# EAGLE board BlueSMiRF-ChipAnt-GiantPanel (EAGLE 6.4), part 1 of 5
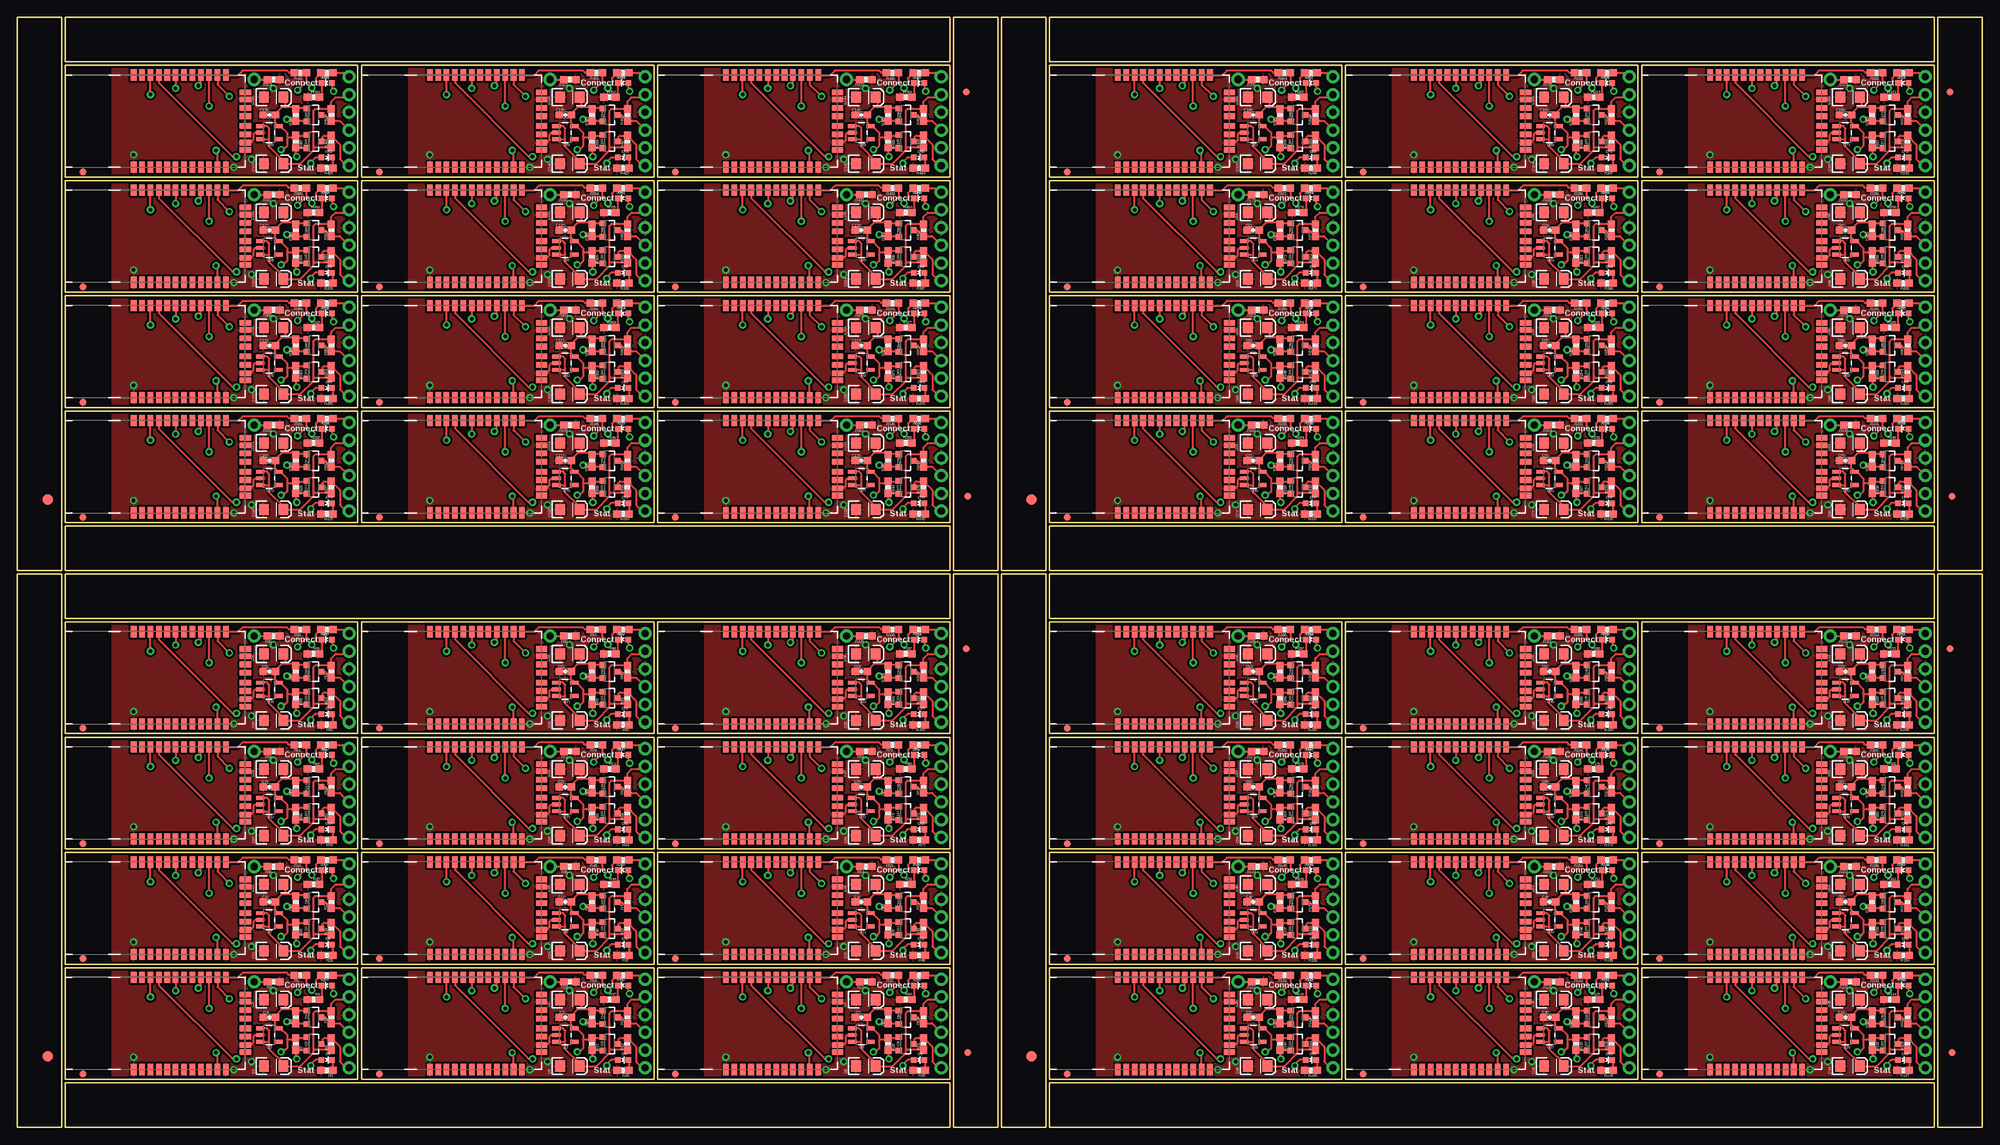
[diagram p0: board, top side]
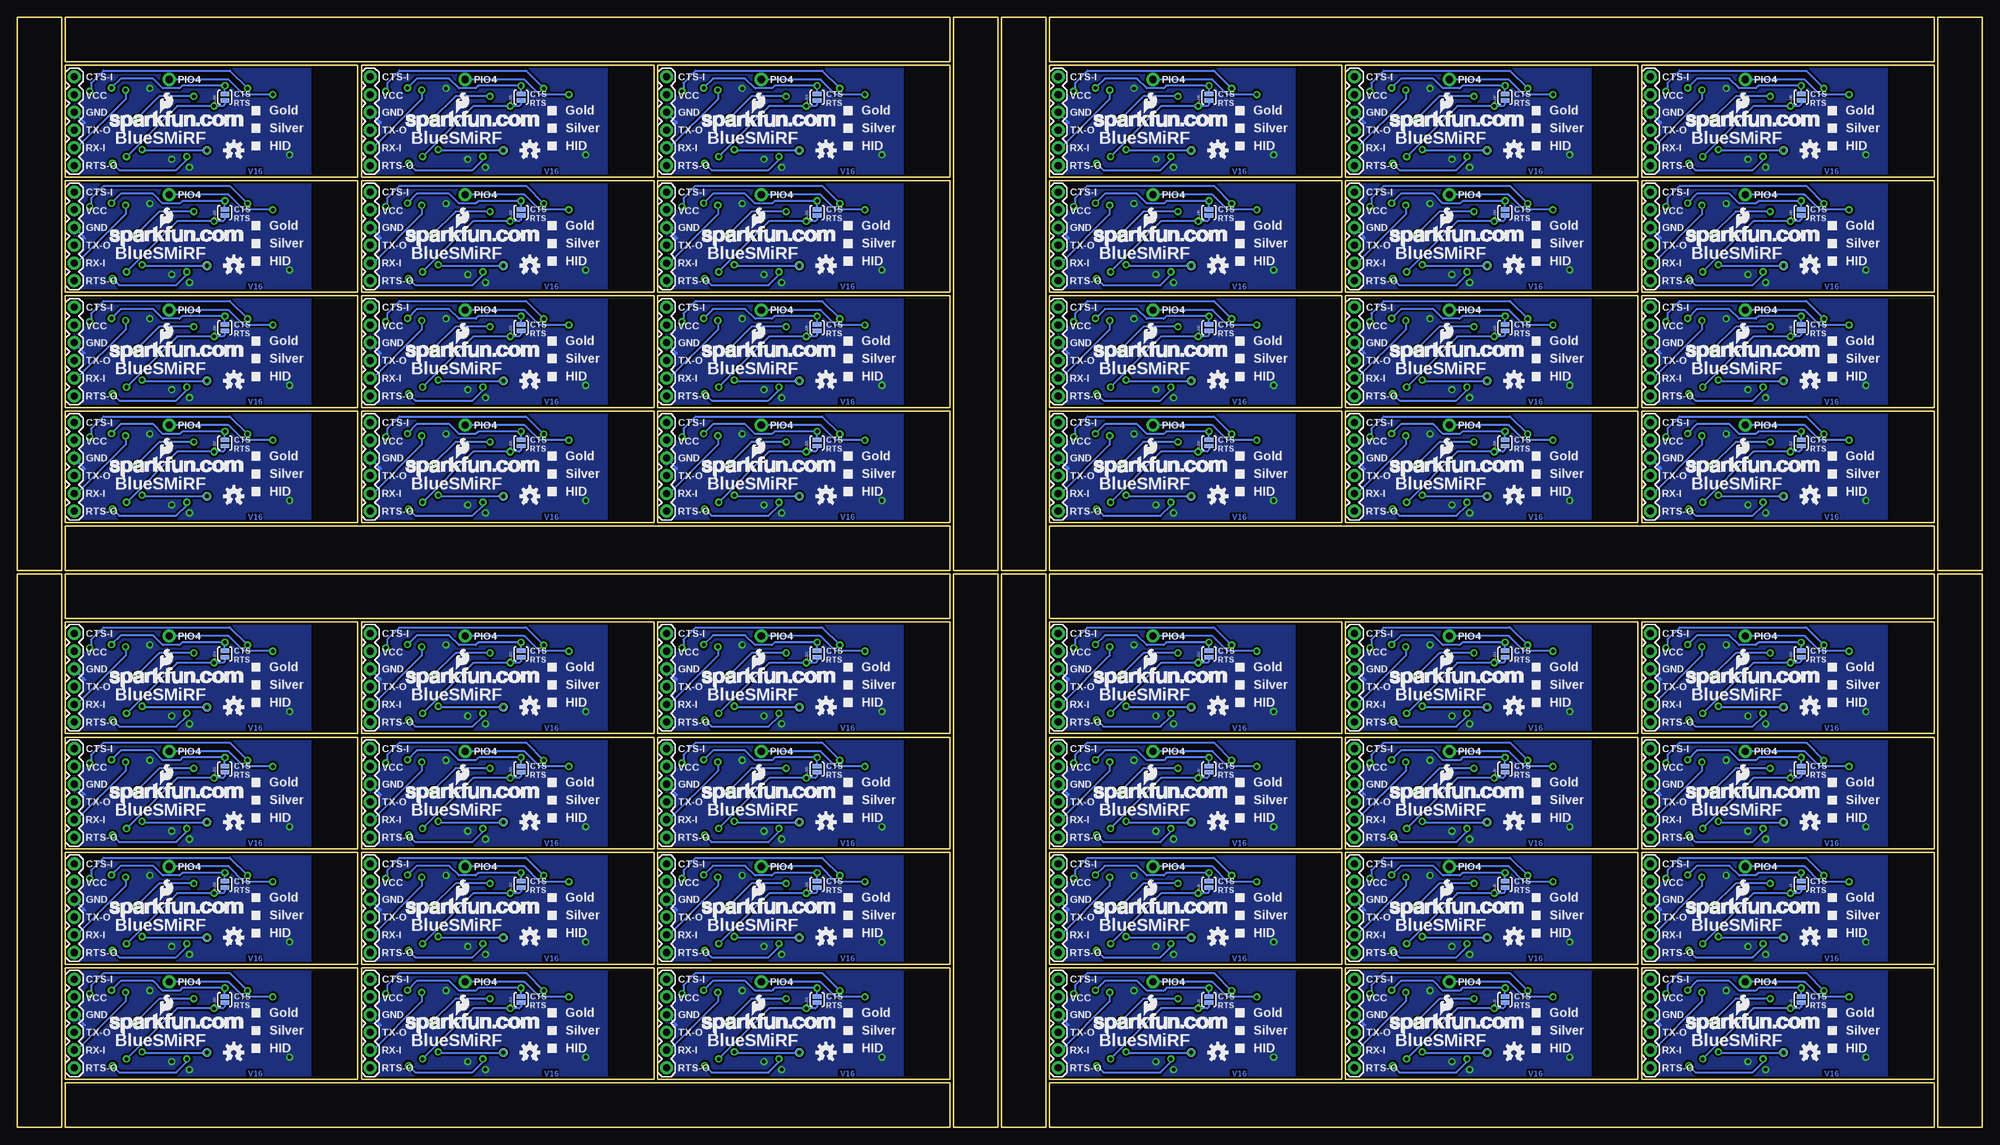
[diagram p1: board, bottom side, seen from below]

Size 281.43 x 159 mm. Coordinates in mm from the lower left corner, seen from the top.
Outline: 256 segments
Copper layers (1*16): Top 0.035mm / dielectric 1.5mm / Bottom 0.035mm
Design rules "SparkFun *": minimum track width 8mil, minimum drill 20mil, track to track 8mil, track to pad 8mil, pad to pad 8mil, via to via 8mil, smd to smd 8mil, copper to edge 10mil, drill to drill 8mil, minimum pad ring 12mil, minimum via ring 10mil, stop-mask expansion 4mil, vias tented up to drill 20mil, thermal gap 10mil

## Footprints (pad centres in the part's own frame; a part is rotated, then mirrored left to right if it is on the bottom)
EIA3216 = smd 1.4 x 1.6: A 1.4,0; C -1.4,0
0603-CAP = smd 1.1 x 1: 1 -0.85,0; 2 0.85,0
LED-0603 = smd 0.8 x 0.8: A 0,-0.75; C 0,0.75
FIDUCIAL-1.5X3 = smd 1.5 x 1.5: 1 0,0
FIDUCIAL-1X2 = smd 1 x 1: 1 0,0
1X06 = drill 1.016 pad 1.88: 1 0,0; 2 2.54,0; 3 5.08,0; 4 7.62,0; 5 10.16,0; 6 12.7,0
1X01NS = drill 1.016 pad 1.88: 1 0,0
SOT23-3 = smd 0.8 x 0.9: 1 -0.95,-1; 2 0.95,-1; 3 0,1.1
0603-RES = smd 1.1 x 1: 1 -0.85,0; 2 0.85,0
SJ_2S-NO = smd 0.635 x 1.27: 1 -0.45,0; 2 0.45,0
PAD.03X.05 = smd 1.27 x 1.27: P$1 0,0
RN41 = smd 0.8 x 1.6: 1 -6.6,-6.6; 2 -5.4,-6.6; 3 -4.2,-6.6; 4 -3,-6.6; 5 -1.8,-6.6; 6 -0.6,-6.6; 7 0.6,-6.6; 8 1.8,-6.6; 9 3,-6.6; 10 4.2,-6.6; 11 5.4,-6.6; 12 6.6,-6.6; 13 6.6,6.6; 14 5.4,6.6; 15 4.2,6.6; 16 3,6.6; 17 1.8,6.6; 18 0.6,6.6; 19 -0.6,6.6; 20 -1.8,6.6; 21 -3,6.6; 22 -4.2,6.6; 23 -5.4,6.6; 24 -6.6,6.6 | smd 1.6 x 0.8: 28 9.4,3.1; 29 9.4,-3.1; 30 9.4,4.122; 31 9.4,1.9; 32 9.4,0.7; 33 9.4,-0.7; 34 9.4,-1.9; 35 9.4,-4.122
SOT23-5 = smd 0.55 x 1.2: 1 -0.95,-1.3; 2 0,-1.3; 3 0.95,-1.3; 4 0.95,1.3; 5 -0.95,1.3

## Placement (x,y rotation side)
C1  10uF  [EIA3216]  36.7,8.76 0 top
C2  1uF  [0603-CAP]  78.49,15.75 180 top
C3  10uF  [EIA3216]  36.7,18.29 0 top
C4  1uF  [0603-CAP]  36.07,15.75 180 top
C5  10uF  [EIA3216]  79.12,8.76 0 top
C6  10uF  [EIA3216]  79.12,18.29 0 top
C7  1uF  [0603-CAP]  120.9,15.75 180 top
C8  10uF  [EIA3216]  121.54,8.76 0 top
C9  10uF  [EIA3216]  121.54,18.29 0 top
C10  1uF  [0603-CAP]  36.07,32.26 180 top
C11  10uF  [EIA3216]  36.7,25.27 0 top
C12  10uF  [EIA3216]  36.7,34.8 0 top
C13  1uF  [0603-CAP]  78.49,32.26 180 top
C14  10uF  [EIA3216]  79.12,25.27 0 top
C15  10uF  [EIA3216]  79.12,34.8 0 top
C16  1uF  [0603-CAP]  120.9,32.26 180 top
C17  10uF  [EIA3216]  121.54,25.27 0 top
C18  10uF  [EIA3216]  121.54,34.8 0 top
C19  1uF  [0603-CAP]  36.07,48.77 180 top
C20  10uF  [EIA3216]  36.7,41.78 0 top
C21  10uF  [EIA3216]  36.7,51.31 0 top
C22  1uF  [0603-CAP]  78.49,48.77 180 top
C23  10uF  [EIA3216]  79.12,41.78 0 top
C24  10uF  [EIA3216]  79.12,51.31 0 top
C25  1uF  [0603-CAP]  120.9,48.77 180 top
C26  10uF  [EIA3216]  121.54,41.78 0 top
C27  10uF  [EIA3216]  121.54,51.31 0 top
C28  1uF  [0603-CAP]  36.07,65.28 180 top
C29  10uF  [EIA3216]  36.7,58.29 0 top
C30  10uF  [EIA3216]  36.7,67.82 0 top
C31  1uF  [0603-CAP]  78.49,65.28 180 top
C32  10uF  [EIA3216]  79.12,58.29 0 top
C33  10uF  [EIA3216]  79.12,67.82 0 top
C34  1uF  [0603-CAP]  120.9,65.28 180 top
C35  10uF  [EIA3216]  121.54,58.29 0 top
C36  10uF  [EIA3216]  121.54,67.82 0 top
C37  1uF  [0603-CAP]  177.04,15.75 180 top
C38  10uF  [EIA3216]  177.67,8.76 0 top
C39  10uF  [EIA3216]  177.67,18.29 0 top
C40  1uF  [0603-CAP]  219.46,15.75 180 top
C41  10uF  [EIA3216]  220.09,8.76 0 top
C42  10uF  [EIA3216]  220.09,18.29 0 top
C43  1uF  [0603-CAP]  261.87,15.75 180 top
C44  10uF  [EIA3216]  262.51,8.76 0 top
C45  10uF  [EIA3216]  262.51,18.29 0 top
C46  1uF  [0603-CAP]  177.04,32.26 180 top
C47  10uF  [EIA3216]  177.67,25.27 0 top
C48  10uF  [EIA3216]  177.67,34.8 0 top
C49  1uF  [0603-CAP]  219.46,32.26 180 top
C50  10uF  [EIA3216]  220.09,25.27 0 top
C51  10uF  [EIA3216]  220.09,34.8 0 top
C52  1uF  [0603-CAP]  261.87,32.26 180 top
C53  10uF  [EIA3216]  262.51,25.27 0 top
C54  10uF  [EIA3216]  262.51,34.8 0 top
C55  1uF  [0603-CAP]  177.04,48.77 180 top
C56  10uF  [EIA3216]  177.67,41.78 0 top
C57  10uF  [EIA3216]  177.67,51.31 0 top
C58  1uF  [0603-CAP]  219.46,48.77 180 top
C59  10uF  [EIA3216]  220.09,41.78 0 top
C60  10uF  [EIA3216]  220.09,51.31 0 top
C61  1uF  [0603-CAP]  261.87,48.77 180 top
C62  10uF  [EIA3216]  262.51,41.78 0 top
C63  10uF  [EIA3216]  262.51,51.31 0 top
C64  1uF  [0603-CAP]  177.04,65.28 180 top
C65  10uF  [EIA3216]  177.67,58.29 0 top
C66  10uF  [EIA3216]  177.67,67.82 0 top
C67  1uF  [0603-CAP]  219.46,65.28 180 top
C68  10uF  [EIA3216]  220.09,58.29 0 top
C69  10uF  [EIA3216]  220.09,67.82 0 top
C70  1uF  [0603-CAP]  261.87,65.28 180 top
C71  10uF  [EIA3216]  262.51,58.29 0 top
C72  10uF  [EIA3216]  262.51,67.82 0 top
C73  1uF  [0603-CAP]  177.04,95.5 180 top
C74  10uF  [EIA3216]  177.67,88.52 0 top
C75  10uF  [EIA3216]  177.67,98.04 0 top
C76  1uF  [0603-CAP]  219.46,95.5 180 top
C77  10uF  [EIA3216]  220.09,88.52 0 top
C78  10uF  [EIA3216]  220.09,98.04 0 top
C79  1uF  [0603-CAP]  261.87,95.5 180 top
C80  10uF  [EIA3216]  262.51,88.52 0 top
C81  10uF  [EIA3216]  262.51,98.04 0 top
C82  1uF  [0603-CAP]  177.04,112.01 180 top
C83  10uF  [EIA3216]  177.67,105.03 0 top
C84  10uF  [EIA3216]  177.67,114.55 0 top
C85  1uF  [0603-CAP]  219.46,112.01 180 top
C86  10uF  [EIA3216]  220.09,105.03 0 top
C87  10uF  [EIA3216]  220.09,114.55 0 top
C88  1uF  [0603-CAP]  261.87,112.01 180 top
C89  10uF  [EIA3216]  262.51,105.03 0 top
C90  10uF  [EIA3216]  262.51,114.55 0 top
C91  1uF  [0603-CAP]  177.04,128.52 180 top
C92  10uF  [EIA3216]  177.67,121.54 0 top
C93  10uF  [EIA3216]  177.67,131.06 0 top
C94  1uF  [0603-CAP]  219.46,128.52 180 top
C95  10uF  [EIA3216]  220.09,121.54 0 top
C96  10uF  [EIA3216]  220.09,131.06 0 top
C97  1uF  [0603-CAP]  261.87,128.52 180 top
C98  10uF  [EIA3216]  262.51,121.54 0 top
C99  10uF  [EIA3216]  262.51,131.06 0 top
C100  1uF  [0603-CAP]  177.04,145.03 180 top
C101  10uF  [EIA3216]  177.67,138.05 0 top
C102  10uF  [EIA3216]  177.67,147.57 0 top
C103  1uF  [0603-CAP]  219.46,145.03 180 top
C104  10uF  [EIA3216]  220.09,138.05 0 top
C105  10uF  [EIA3216]  220.09,147.57 0 top
C106  1uF  [0603-CAP]  261.87,145.03 180 top
C107  10uF  [EIA3216]  262.51,138.05 0 top
C108  10uF  [EIA3216]  262.51,147.57 0 top
C109  1uF  [0603-CAP]  36.07,95.5 180 top
C110  10uF  [EIA3216]  36.7,88.52 0 top
C111  10uF  [EIA3216]  36.7,98.04 0 top
C112  1uF  [0603-CAP]  78.49,95.5 180 top
C113  10uF  [EIA3216]  79.12,88.52 0 top
C114  10uF  [EIA3216]  79.12,98.04 0 top
C115  1uF  [0603-CAP]  120.9,95.5 180 top
C116  10uF  [EIA3216]  121.54,88.52 0 top
C117  10uF  [EIA3216]  121.54,98.04 0 top
C118  1uF  [0603-CAP]  36.07,112.01 180 top
C119  10uF  [EIA3216]  36.7,105.03 0 top
C120  10uF  [EIA3216]  36.7,114.55 0 top
C121  1uF  [0603-CAP]  78.49,112.01 180 top
C122  10uF  [EIA3216]  79.12,105.03 0 top
C123  10uF  [EIA3216]  79.12,114.55 0 top
C124  1uF  [0603-CAP]  120.9,112.01 180 top
C125  10uF  [EIA3216]  121.54,105.03 0 top
C126  10uF  [EIA3216]  121.54,114.55 0 top
C127  1uF  [0603-CAP]  36.07,128.52 180 top
C128  10uF  [EIA3216]  36.7,121.54 0 top
C129  10uF  [EIA3216]  36.7,131.06 0 top
C130  1uF  [0603-CAP]  78.49,128.52 180 top
C131  10uF  [EIA3216]  79.12,121.54 0 top
C132  10uF  [EIA3216]  79.12,131.06 0 top
C133  1uF  [0603-CAP]  120.9,128.52 180 top
C134  10uF  [EIA3216]  121.54,121.54 0 top
C135  10uF  [EIA3216]  121.54,131.06 0 top
C136  1uF  [0603-CAP]  36.07,145.03 180 top
C137  10uF  [EIA3216]  36.7,138.05 0 top
C138  10uF  [EIA3216]  36.7,147.57 0 top
C139  1uF  [0603-CAP]  78.49,145.03 180 top
C140  10uF  [EIA3216]  79.12,138.05 0 top
C141  10uF  [EIA3216]  79.12,147.57 0 top
C142  1uF  [0603-CAP]  120.9,145.03 180 top
C143  10uF  [EIA3216]  121.54,138.05 0 top
C144  10uF  [EIA3216]  121.54,147.57 0 top
D1  Red  [LED-0603]  44.32,9.65 270 top
D2  Green  [LED-0603]  44.32,20.32 90 top
D3  Green  [LED-0603]  86.74,20.32 90 top
D4  Red  [LED-0603]  86.74,9.65 270 top
D5  Green  [LED-0603]  129.16,20.32 90 top
D6  Red  [LED-0603]  129.16,9.65 270 top
D7  Green  [LED-0603]  44.32,36.83 90 top
D8  Red  [LED-0603]  44.32,26.16 270 top
D9  Green  [LED-0603]  86.74,36.83 90 top
D10  Red  [LED-0603]  86.74,26.16 270 top
D11  Green  [LED-0603]  129.16,36.83 90 top
D12  Red  [LED-0603]  129.16,26.16 270 top
D13  Green  [LED-0603]  44.32,53.34 90 top
D14  Red  [LED-0603]  44.32,42.67 270 top
D15  Green  [LED-0603]  86.74,53.34 90 top
D16  Red  [LED-0603]  86.74,42.67 270 top
D17  Green  [LED-0603]  129.16,53.34 90 top
D18  Red  [LED-0603]  129.16,42.67 270 top
D19  Green  [LED-0603]  44.32,69.85 90 top
D20  Red  [LED-0603]  44.32,59.18 270 top
D21  Green  [LED-0603]  86.74,69.85 90 top
D22  Red  [LED-0603]  86.74,59.18 270 top
D23  Green  [LED-0603]  129.16,69.85 90 top
D24  Red  [LED-0603]  129.16,59.18 270 top
D25  Green  [LED-0603]  185.29,20.32 90 top
D26  Red  [LED-0603]  185.29,9.65 270 top
D27  Green  [LED-0603]  227.71,20.32 90 top
D28  Red  [LED-0603]  227.71,9.65 270 top
D29  Green  [LED-0603]  270.13,20.32 90 top
D30  Red  [LED-0603]  270.13,9.65 270 top
D31  Green  [LED-0603]  185.29,36.83 90 top
D32  Red  [LED-0603]  185.29,26.16 270 top
D33  Green  [LED-0603]  227.71,36.83 90 top
D34  Red  [LED-0603]  227.71,26.16 270 top
D35  Green  [LED-0603]  270.13,36.83 90 top
D36  Red  [LED-0603]  270.13,26.16 270 top
D37  Green  [LED-0603]  185.29,53.34 90 top
D38  Red  [LED-0603]  185.29,42.67 270 top
D39  Green  [LED-0603]  227.71,53.34 90 top
D40  Red  [LED-0603]  227.71,42.67 270 top
D41  Green  [LED-0603]  270.13,53.34 90 top
D42  Red  [LED-0603]  270.13,42.67 270 top
D43  Green  [LED-0603]  185.29,69.85 90 top
D44  Red  [LED-0603]  185.29,59.18 270 top
D45  Green  [LED-0603]  227.71,69.85 90 top
D46  Red  [LED-0603]  227.71,59.18 270 top
D47  Green  [LED-0603]  270.13,69.85 90 top
D48  Red  [LED-0603]  270.13,59.18 270 top
D49  Green  [LED-0603]  185.29,100.08 90 top
D50  Red  [LED-0603]  185.29,89.41 270 top
D51  Green  [LED-0603]  227.71,100.08 90 top
D52  Red  [LED-0603]  227.71,89.41 270 top
D53  Green  [LED-0603]  270.13,100.08 90 top
D54  Red  [LED-0603]  270.13,89.41 270 top
D55  Green  [LED-0603]  185.29,116.59 90 top
D56  Red  [LED-0603]  185.29,105.92 270 top
D57  Green  [LED-0603]  227.71,116.59 90 top
D58  Red  [LED-0603]  227.71,105.92 270 top
D59  Green  [LED-0603]  270.13,116.59 90 top
D60  Red  [LED-0603]  270.13,105.92 270 top
D61  Green  [LED-0603]  185.29,133.1 90 top
D62  Red  [LED-0603]  185.29,122.43 270 top
D63  Green  [LED-0603]  227.71,133.1 90 top
D64  Red  [LED-0603]  227.71,122.43 270 top
D65  Green  [LED-0603]  270.13,133.1 90 top
D66  Red  [LED-0603]  270.13,122.43 270 top
D67  Green  [LED-0603]  185.29,149.61 90 top
D68  Red  [LED-0603]  185.29,138.94 270 top
D69  Green  [LED-0603]  227.71,149.61 90 top
D70  Red  [LED-0603]  227.71,138.94 270 top
D71  Green  [LED-0603]  270.13,149.61 90 top
D72  Red  [LED-0603]  270.13,138.94 270 top
D73  Green  [LED-0603]  44.32,100.08 90 top
D74  Red  [LED-0603]  44.32,89.41 270 top
D75  Green  [LED-0603]  86.74,100.08 90 top
D76  Red  [LED-0603]  86.74,89.41 270 top
D77  Green  [LED-0603]  129.16,100.08 90 top
D78  Red  [LED-0603]  129.16,89.41 270 top
D79  Green  [LED-0603]  44.32,116.59 90 top
D80  Red  [LED-0603]  44.32,105.92 270 top
D81  Green  [LED-0603]  86.74,116.59 90 top
D82  Red  [LED-0603]  86.74,105.92 270 top
D83  Green  [LED-0603]  129.16,116.59 90 top
D84  Red  [LED-0603]  129.16,105.92 270 top
D85  Green  [LED-0603]  44.32,133.1 90 top
D86  Red  [LED-0603]  44.32,122.43 270 top
D87  Green  [LED-0603]  86.74,133.1 90 top
D88  Red  [LED-0603]  86.74,122.43 270 top
D89  Green  [LED-0603]  129.16,133.1 90 top
D90  Red  [LED-0603]  129.16,122.43 270 top
D91  Green  [LED-0603]  44.32,149.61 90 top
D92  Red  [LED-0603]  44.32,138.94 270 top
D93  Green  [LED-0603]  86.74,149.61 90 top
D94  Red  [LED-0603]  86.74,138.94 270 top
D95  Green  [LED-0603]  129.16,149.61 90 top
D96  Red  [LED-0603]  129.16,138.94 270 top
E$1  [FIDUCIAL-1.5X3]  4.32,10.16 0 top
E$2  [FIDUCIAL-1X2]  277.11,10.67 0 top
E$3  [FIDUCIAL-1X2]  276.86,68.58 180 top
E$4  [FIDUCIAL-1X2]  136.14,10.67 0 top
E$5  [FIDUCIAL-1.5X3]  145.29,10.16 0 top
E$6  [FIDUCIAL-1X2]  135.89,68.58 180 top
E$7  [FIDUCIAL-1X2]  277.11,90.42 0 top
E$8  [FIDUCIAL-1X2]  276.86,148.34 180 top
E$9  [FIDUCIAL-1.5X3]  145.29,89.92 0 top
E$10  [FIDUCIAL-1X2]  136.14,90.42 0 top
E$11  [FIDUCIAL-1X2]  135.89,148.34 180 top
E$12  [FIDUCIAL-1.5X3]  4.32,89.92 0 top
JP1  [1X06]  47.5,21.21 270 bottom
JP2  M01SMDNS  [1X01NS]  33.91,20.83 0 top
JP3  [1X06]  89.92,21.21 270 bottom
JP4  FIDUCIAL1X2  [FIDUCIAL-1X2]  9.4,7.62 0 top
JP5  M01SMDNS  [1X01NS]  76.33,20.83 0 top
JP6  FIDUCIAL1X2  [FIDUCIAL-1X2]  51.82,7.62 0 top
JP7  [1X06]  132.33,21.21 270 bottom
JP8  M01SMDNS  [1X01NS]  118.75,20.83 0 top
JP9  FIDUCIAL1X2  [FIDUCIAL-1X2]  94.23,7.62 0 top
JP10  [1X06]  47.5,37.72 270 bottom
JP11  M01SMDNS  [1X01NS]  33.91,37.34 0 top
JP12  FIDUCIAL1X2  [FIDUCIAL-1X2]  9.4,24.13 0 top
JP13  [1X06]  89.92,37.72 270 bottom
JP14  M01SMDNS  [1X01NS]  76.33,37.34 0 top
JP15  FIDUCIAL1X2  [FIDUCIAL-1X2]  51.82,24.13 0 top
JP16  [1X06]  132.33,37.72 270 bottom
JP17  M01SMDNS  [1X01NS]  118.75,37.34 0 top
JP18  FIDUCIAL1X2  [FIDUCIAL-1X2]  94.23,24.13 0 top
JP19  [1X06]  47.5,54.23 270 bottom
JP20  M01SMDNS  [1X01NS]  33.91,53.85 0 top
JP21  FIDUCIAL1X2  [FIDUCIAL-1X2]  9.4,40.64 0 top
JP22  [1X06]  89.92,54.23 270 bottom
JP23  M01SMDNS  [1X01NS]  76.33,53.85 0 top
JP24  FIDUCIAL1X2  [FIDUCIAL-1X2]  51.82,40.64 0 top
JP25  [1X06]  132.33,54.23 270 bottom
JP26  M01SMDNS  [1X01NS]  118.75,53.85 0 top
JP27  FIDUCIAL1X2  [FIDUCIAL-1X2]  94.23,40.64 0 top
JP28  [1X06]  47.5,70.74 270 bottom
JP29  M01SMDNS  [1X01NS]  33.91,70.36 0 top
JP30  FIDUCIAL1X2  [FIDUCIAL-1X2]  9.4,57.15 0 top
JP31  [1X06]  89.92,70.74 270 bottom
JP32  M01SMDNS  [1X01NS]  76.33,70.36 0 top
JP33  FIDUCIAL1X2  [FIDUCIAL-1X2]  51.82,57.15 0 top
JP34  [1X06]  132.33,70.74 270 bottom
JP35  M01SMDNS  [1X01NS]  118.75,70.36 0 top
JP36  FIDUCIAL1X2  [FIDUCIAL-1X2]  94.23,57.15 0 top
JP37  [1X06]  188.47,21.21 270 bottom
JP38  M01SMDNS  [1X01NS]  174.88,20.83 0 top
JP39  FIDUCIAL1X2  [FIDUCIAL-1X2]  150.37,7.62 0 top
JP40  [1X06]  230.89,21.21 270 bottom
JP41  M01SMDNS  [1X01NS]  217.3,20.83 0 top
JP42  FIDUCIAL1X2  [FIDUCIAL-1X2]  192.79,7.62 0 top
JP43  [1X06]  273.3,21.21 270 bottom
JP44  M01SMDNS  [1X01NS]  259.71,20.83 0 top
JP45  FIDUCIAL1X2  [FIDUCIAL-1X2]  235.2,7.62 0 top
JP46  [1X06]  188.47,37.72 270 bottom
JP47  M01SMDNS  [1X01NS]  174.88,37.34 0 top
JP48  FIDUCIAL1X2  [FIDUCIAL-1X2]  150.37,24.13 0 top
JP49  [1X06]  230.89,37.72 270 bottom
JP50  M01SMDNS  [1X01NS]  217.3,37.34 0 top
JP51  FIDUCIAL1X2  [FIDUCIAL-1X2]  192.79,24.13 0 top
JP52  [1X06]  273.3,37.72 270 bottom
JP53  M01SMDNS  [1X01NS]  259.71,37.34 0 top
JP54  FIDUCIAL1X2  [FIDUCIAL-1X2]  235.2,24.13 0 top
JP55  [1X06]  188.47,54.23 270 bottom
JP56  M01SMDNS  [1X01NS]  174.88,53.85 0 top
JP57  FIDUCIAL1X2  [FIDUCIAL-1X2]  150.37,40.64 0 top
JP58  [1X06]  230.89,54.23 270 bottom
JP59  M01SMDNS  [1X01NS]  217.3,53.85 0 top
JP60  FIDUCIAL1X2  [FIDUCIAL-1X2]  192.79,40.64 0 top
JP61  [1X06]  273.3,54.23 270 bottom
JP62  M01SMDNS  [1X01NS]  259.71,53.85 0 top
JP63  FIDUCIAL1X2  [FIDUCIAL-1X2]  235.2,40.64 0 top
JP64  [1X06]  188.47,70.74 270 bottom
JP65  M01SMDNS  [1X01NS]  174.88,70.36 0 top
JP66  FIDUCIAL1X2  [FIDUCIAL-1X2]  150.37,57.15 0 top
JP67  [1X06]  230.89,70.74 270 bottom
JP68  M01SMDNS  [1X01NS]  217.3,70.36 0 top
JP69  FIDUCIAL1X2  [FIDUCIAL-1X2]  192.79,57.15 0 top
JP70  [1X06]  273.3,70.74 270 bottom
JP71  M01SMDNS  [1X01NS]  259.71,70.36 0 top
JP72  FIDUCIAL1X2  [FIDUCIAL-1X2]  235.2,57.15 0 top
JP73  [1X06]  188.47,100.97 270 bottom
JP74  M01SMDNS  [1X01NS]  174.88,100.58 0 top
JP75  FIDUCIAL1X2  [FIDUCIAL-1X2]  150.37,87.38 0 top
JP76  [1X06]  230.89,100.97 270 bottom
JP77  M01SMDNS  [1X01NS]  217.3,100.58 0 top
JP78  FIDUCIAL1X2  [FIDUCIAL-1X2]  192.79,87.38 0 top
JP79  [1X06]  273.3,100.97 270 bottom
JP80  M01SMDNS  [1X01NS]  259.71,100.58 0 top
JP81  FIDUCIAL1X2  [FIDUCIAL-1X2]  235.2,87.38 0 top
JP82  [1X06]  188.47,117.47 270 bottom
JP83  M01SMDNS  [1X01NS]  174.88,117.09 0 top
JP84  FIDUCIAL1X2  [FIDUCIAL-1X2]  150.37,103.89 0 top
JP85  [1X06]  230.89,117.47 270 bottom
JP86  M01SMDNS  [1X01NS]  217.3,117.09 0 top
JP87  FIDUCIAL1X2  [FIDUCIAL-1X2]  192.79,103.89 0 top
JP88  [1X06]  273.3,117.47 270 bottom
JP89  M01SMDNS  [1X01NS]  259.71,117.09 0 top
JP90  FIDUCIAL1X2  [FIDUCIAL-1X2]  235.2,103.89 0 top
JP91  [1X06]  188.47,133.99 270 bottom
JP92  M01SMDNS  [1X01NS]  174.88,133.6 0 top
JP93  FIDUCIAL1X2  [FIDUCIAL-1X2]  150.37,120.4 0 top
JP94  [1X06]  230.89,133.99 270 bottom
JP95  M01SMDNS  [1X01NS]  217.3,133.6 0 top
JP96  FIDUCIAL1X2  [FIDUCIAL-1X2]  192.79,120.4 0 top
JP97  [1X06]  273.3,133.99 270 bottom
JP98  M01SMDNS  [1X01NS]  259.71,133.6 0 top
JP99  FIDUCIAL1X2  [FIDUCIAL-1X2]  235.2,120.4 0 top
JP100  [1X06]  188.47,150.5 270 bottom
JP101  M01SMDNS  [1X01NS]  174.88,150.11 0 top
JP102  FIDUCIAL1X2  [FIDUCIAL-1X2]  150.37,136.91 0 top
JP103  [1X06]  230.89,150.5 270 bottom
JP104  M01SMDNS  [1X01NS]  217.3,150.11 0 top
JP105  FIDUCIAL1X2  [FIDUCIAL-1X2]  192.79,136.91 0 top
JP106  [1X06]  273.3,150.5 270 bottom
JP107  M01SMDNS  [1X01NS]  259.71,150.11 0 top
JP108  FIDUCIAL1X2  [FIDUCIAL-1X2]  235.2,136.91 0 top
JP109  [1X06]  47.5,100.97 270 bottom
JP110  M01SMDNS  [1X01NS]  33.91,100.58 0 top
JP111  FIDUCIAL1X2  [FIDUCIAL-1X2]  9.4,87.38 0 top
JP112  [1X06]  89.92,100.97 270 bottom
JP113  M01SMDNS  [1X01NS]  76.33,100.58 0 top
JP114  FIDUCIAL1X2  [FIDUCIAL-1X2]  51.82,87.38 0 top
JP115  [1X06]  132.33,100.97 270 bottom
JP116  M01SMDNS  [1X01NS]  118.75,100.58 0 top
JP117  FIDUCIAL1X2  [FIDUCIAL-1X2]  94.23,87.38 0 top
JP118  [1X06]  47.5,117.47 270 bottom
JP119  M01SMDNS  [1X01NS]  33.91,117.09 0 top
JP120  FIDUCIAL1X2  [FIDUCIAL-1X2]  9.4,103.89 0 top
JP121  [1X06]  89.92,117.47 270 bottom
JP122  M01SMDNS  [1X01NS]  76.33,117.09 0 top
JP123  FIDUCIAL1X2  [FIDUCIAL-1X2]  51.82,103.89 0 top
JP124  [1X06]  132.33,117.47 270 bottom
JP125  M01SMDNS  [1X01NS]  118.75,117.09 0 top
JP126  FIDUCIAL1X2  [FIDUCIAL-1X2]  94.23,103.89 0 top
JP127  [1X06]  47.5,133.99 270 bottom
JP128  M01SMDNS  [1X01NS]  33.91,133.6 0 top
JP129  FIDUCIAL1X2  [FIDUCIAL-1X2]  9.4,120.4 0 top
JP130  [1X06]  89.92,133.99 270 bottom
JP131  M01SMDNS  [1X01NS]  76.33,133.6 0 top
JP132  FIDUCIAL1X2  [FIDUCIAL-1X2]  51.82,120.4 0 top
JP133  [1X06]  132.33,133.99 270 bottom
JP134  M01SMDNS  [1X01NS]  118.75,133.6 0 top
JP135  FIDUCIAL1X2  [FIDUCIAL-1X2]  94.23,120.4 0 top
JP136  [1X06]  47.5,150.5 270 bottom
JP137  M01SMDNS  [1X01NS]  33.91,150.11 0 top
JP138  FIDUCIAL1X2  [FIDUCIAL-1X2]  9.4,136.91 0 top
JP139  [1X06]  89.92,150.5 270 bottom
JP140  M01SMDNS  [1X01NS]  76.33,150.11 0 top
JP141  FIDUCIAL1X2  [FIDUCIAL-1X2]  51.82,136.91 0 top
JP142  [1X06]  132.33,150.5 270 bottom
JP143  M01SMDNS  [1X01NS]  118.75,150.11 0 top
JP144  FIDUCIAL1X2  [FIDUCIAL-1X2]  94.23,136.91 0 top
LOGO1  OSHW-LOGOS  [OSHW-LOGO-S]  24.64,10.67 0 bottom
LOGO2  OSHW-LOGOS  [OSHW-LOGO-S]  67.06,10.67 0 bottom
LOGO3  OSHW-LOGOS  [OSHW-LOGO-S]  109.47,10.67 0 bottom
LOGO4  OSHW-LOGOS  [OSHW-LOGO-S]  24.64,27.18 0 bottom
LOGO5  OSHW-LOGOS  [OSHW-LOGO-S]  67.06,27.18 0 bottom
LOGO6  OSHW-LOGOS  [OSHW-LOGO-S]  109.47,27.18 0 bottom
LOGO7  OSHW-LOGOS  [OSHW-LOGO-S]  24.64,43.69 0 bottom
LOGO8  OSHW-LOGOS  [OSHW-LOGO-S]  67.06,43.69 0 bottom
LOGO9  OSHW-LOGOS  [OSHW-LOGO-S]  109.47,43.69 0 bottom
LOGO10  OSHW-LOGOS  [OSHW-LOGO-S]  24.64,60.2 0 bottom
LOGO11  OSHW-LOGOS  [OSHW-LOGO-S]  67.06,60.2 0 bottom
LOGO12  OSHW-LOGOS  [OSHW-LOGO-S]  109.47,60.2 0 bottom
LOGO13  OSHW-LOGOS  [OSHW-LOGO-S]  165.61,10.67 0 bottom
LOGO14  OSHW-LOGOS  [OSHW-LOGO-S]  208.03,10.67 0 bottom
LOGO15  OSHW-LOGOS  [OSHW-LOGO-S]  250.44,10.67 0 bottom
LOGO16  OSHW-LOGOS  [OSHW-LOGO-S]  165.61,27.18 0 bottom
LOGO17  OSHW-LOGOS  [OSHW-LOGO-S]  208.03,27.18 0 bottom
LOGO18  OSHW-LOGOS  [OSHW-LOGO-S]  250.44,27.18 0 bottom
LOGO19  OSHW-LOGOS  [OSHW-LOGO-S]  165.61,43.69 0 bottom
LOGO20  OSHW-LOGOS  [OSHW-LOGO-S]  208.03,43.69 0 bottom
LOGO21  OSHW-LOGOS  [OSHW-LOGO-S]  250.44,43.69 0 bottom
LOGO22  OSHW-LOGOS  [OSHW-LOGO-S]  165.61,60.2 0 bottom
LOGO23  OSHW-LOGOS  [OSHW-LOGO-S]  208.03,60.2 0 bottom
LOGO24  OSHW-LOGOS  [OSHW-LOGO-S]  250.44,60.2 0 bottom
LOGO25  OSHW-LOGOS  [OSHW-LOGO-S]  165.61,90.42 0 bottom
LOGO26  OSHW-LOGOS  [OSHW-LOGO-S]  208.03,90.42 0 bottom
LOGO27  OSHW-LOGOS  [OSHW-LOGO-S]  250.44,90.42 0 bottom
LOGO28  OSHW-LOGOS  [OSHW-LOGO-S]  165.61,106.93 0 bottom
LOGO29  OSHW-LOGOS  [OSHW-LOGO-S]  208.03,106.93 0 bottom
LOGO30  OSHW-LOGOS  [OSHW-LOGO-S]  250.44,106.93 0 bottom
LOGO31  OSHW-LOGOS  [OSHW-LOGO-S]  165.61,123.44 0 bottom
LOGO32  OSHW-LOGOS  [OSHW-LOGO-S]  208.03,123.44 0 bottom
LOGO33  OSHW-LOGOS  [OSHW-LOGO-S]  250.44,123.44 0 bottom
LOGO34  OSHW-LOGOS  [OSHW-LOGO-S]  165.61,139.95 0 bottom
LOGO35  OSHW-LOGOS  [OSHW-LOGO-S]  208.03,139.95 0 bottom
LOGO36  OSHW-LOGOS  [OSHW-LOGO-S]  250.44,139.95 0 bottom
LOGO37  OSHW-LOGOS  [OSHW-LOGO-S]  24.64,90.42 0 bottom
LOGO38  OSHW-LOGOS  [OSHW-LOGO-S]  67.06,90.42 0 bottom
LOGO39  OSHW-LOGOS  [OSHW-LOGO-S]  109.47,90.42 0 bottom
LOGO40  OSHW-LOGOS  [OSHW-LOGO-S]  24.64,106.93 0 bottom
LOGO41  OSHW-LOGOS  [OSHW-LOGO-S]  67.06,106.93 0 bottom
LOGO42  OSHW-LOGOS  [OSHW-LOGO-S]  109.47,106.93 0 bottom
LOGO43  OSHW-LOGOS  [OSHW-LOGO-S]  24.64,123.44 0 bottom
LOGO44  OSHW-LOGOS  [OSHW-LOGO-S]  67.06,123.44 0 bottom
LOGO45  OSHW-LOGOS  [OSHW-LOGO-S]  109.47,123.44 0 bottom
LOGO46  OSHW-LOGOS  [OSHW-LOGO-S]  24.64,139.95 0 bottom
LOGO47  OSHW-LOGOS  [OSHW-LOGO-S]  67.06,139.95 0 bottom
LOGO48  OSHW-LOGOS  [OSHW-LOGO-S]  109.47,139.95 0 bottom
Q1  MOSFET-NCHANNELSMD  [SOT23-3]  42.42,15.75 270 top
Q2  MOSFET-NCHANNELSMD  [SOT23-3]  42.42,11.94 270 top
Q3  MOSFET-NCHANNELSMD  [SOT23-3]  84.84,11.94 270 top
Q4  MOSFET-NCHANNELSMD  [SOT23-3]  84.84,15.75 270 top
Q5  MOSFET-NCHANNELSMD  [SOT23-3]  127.25,11.94 270 top
Q6  MOSFET-NCHANNELSMD  [SOT23-3]  127.25,15.75 270 top
Q7  MOSFET-NCHANNELSMD  [SOT23-3]  42.42,28.45 270 top
Q8  MOSFET-NCHANNELSMD  [SOT23-3]  42.42,32.26 270 top
Q9  MOSFET-NCHANNELSMD  [SOT23-3]  84.84,28.45 270 top
Q10  MOSFET-NCHANNELSMD  [SOT23-3]  84.84,32.26 270 top
Q11  MOSFET-NCHANNELSMD  [SOT23-3]  127.25,28.45 270 top
Q12  MOSFET-NCHANNELSMD  [SOT23-3]  127.25,32.26 270 top
Q13  MOSFET-NCHANNELSMD  [SOT23-3]  42.42,44.96 270 top
Q14  MOSFET-NCHANNELSMD  [SOT23-3]  42.42,48.77 270 top
Q15  MOSFET-NCHANNELSMD  [SOT23-3]  84.84,44.96 270 top
Q16  MOSFET-NCHANNELSMD  [SOT23-3]  84.84,48.77 270 top
Q17  MOSFET-NCHANNELSMD  [SOT23-3]  127.25,44.96 270 top
Q18  MOSFET-NCHANNELSMD  [SOT23-3]  127.25,48.77 270 top
Q19  MOSFET-NCHANNELSMD  [SOT23-3]  42.42,61.47 270 top
Q20  MOSFET-NCHANNELSMD  [SOT23-3]  42.42,65.28 270 top
Q21  MOSFET-NCHANNELSMD  [SOT23-3]  84.84,61.47 270 top
Q22  MOSFET-NCHANNELSMD  [SOT23-3]  84.84,65.28 270 top
Q23  MOSFET-NCHANNELSMD  [SOT23-3]  127.25,61.47 270 top
Q24  MOSFET-NCHANNELSMD  [SOT23-3]  127.25,65.28 270 top
Q25  MOSFET-NCHANNELSMD  [SOT23-3]  183.39,11.94 270 top
Q26  MOSFET-NCHANNELSMD  [SOT23-3]  183.39,15.75 270 top
Q27  MOSFET-NCHANNELSMD  [SOT23-3]  225.81,11.94 270 top
Q28  MOSFET-NCHANNELSMD  [SOT23-3]  225.81,15.75 270 top
Q29  MOSFET-NCHANNELSMD  [SOT23-3]  268.22,11.94 270 top
Q30  MOSFET-NCHANNELSMD  [SOT23-3]  268.22,15.75 270 top
Q31  MOSFET-NCHANNELSMD  [SOT23-3]  183.39,28.45 270 top
Q32  MOSFET-NCHANNELSMD  [SOT23-3]  183.39,32.26 270 top
Q33  MOSFET-NCHANNELSMD  [SOT23-3]  225.81,28.45 270 top
Q34  MOSFET-NCHANNELSMD  [SOT23-3]  225.81,32.26 270 top
Q35  MOSFET-NCHANNELSMD  [SOT23-3]  268.22,28.45 270 top
Q36  MOSFET-NCHANNELSMD  [SOT23-3]  268.22,32.26 270 top
Q37  MOSFET-NCHANNELSMD  [SOT23-3]  183.39,44.96 270 top
Q38  MOSFET-NCHANNELSMD  [SOT23-3]  183.39,48.77 270 top
Q39  MOSFET-NCHANNELSMD  [SOT23-3]  225.81,44.96 270 top
Q40  MOSFET-NCHANNELSMD  [SOT23-3]  225.81,48.77 270 top
Q41  MOSFET-NCHANNELSMD  [SOT23-3]  268.22,44.96 270 top
Q42  MOSFET-NCHANNELSMD  [SOT23-3]  268.22,48.77 270 top
Q43  MOSFET-NCHANNELSMD  [SOT23-3]  183.39,61.47 270 top
Q44  MOSFET-NCHANNELSMD  [SOT23-3]  183.39,65.28 270 top
Q45  MOSFET-NCHANNELSMD  [SOT23-3]  225.81,61.47 270 top
Q46  MOSFET-NCHANNELSMD  [SOT23-3]  225.81,65.28 270 top
Q47  MOSFET-NCHANNELSMD  [SOT23-3]  268.22,61.47 270 top
Q48  MOSFET-NCHANNELSMD  [SOT23-3]  268.22,65.28 270 top
Q49  MOSFET-NCHANNELSMD  [SOT23-3]  183.39,91.69 270 top
Q50  MOSFET-NCHANNELSMD  [SOT23-3]  183.39,95.5 270 top
Q51  MOSFET-NCHANNELSMD  [SOT23-3]  225.81,91.69 270 top
Q52  MOSFET-NCHANNELSMD  [SOT23-3]  225.81,95.5 270 top
Q53  MOSFET-NCHANNELSMD  [SOT23-3]  268.22,91.69 270 top
Q54  MOSFET-NCHANNELSMD  [SOT23-3]  268.22,95.5 270 top
Q55  MOSFET-NCHANNELSMD  [SOT23-3]  183.39,108.2 270 top
Q56  MOSFET-NCHANNELSMD  [SOT23-3]  183.39,112.01 270 top
Q57  MOSFET-NCHANNELSMD  [SOT23-3]  225.81,108.2 270 top
Q58  MOSFET-NCHANNELSMD  [SOT23-3]  225.81,112.01 270 top
Q59  MOSFET-NCHANNELSMD  [SOT23-3]  268.22,108.2 270 top
Q60  MOSFET-NCHANNELSMD  [SOT23-3]  268.22,112.01 270 top
Q61  MOSFET-NCHANNELSMD  [SOT23-3]  183.39,124.71 270 top
Q62  MOSFET-NCHANNELSMD  [SOT23-3]  183.39,128.52 270 top
Q63  MOSFET-NCHANNELSMD  [SOT23-3]  225.81,124.71 270 top
Q64  MOSFET-NCHANNELSMD  [SOT23-3]  225.81,128.52 270 top
Q65  MOSFET-NCHANNELSMD  [SOT23-3]  268.22,124.71 270 top
Q66  MOSFET-NCHANNELSMD  [SOT23-3]  268.22,128.52 270 top
Q67  MOSFET-NCHANNELSMD  [SOT23-3]  183.39,141.22 270 top
Q68  MOSFET-NCHANNELSMD  [SOT23-3]  183.39,145.03 270 top
Q69  MOSFET-NCHANNELSMD  [SOT23-3]  225.81,141.22 270 top
Q70  MOSFET-NCHANNELSMD  [SOT23-3]  225.81,145.03 270 top
Q71  MOSFET-NCHANNELSMD  [SOT23-3]  268.22,141.22 270 top
Q72  MOSFET-NCHANNELSMD  [SOT23-3]  268.22,145.03 270 top
Q73  MOSFET-NCHANNELSMD  [SOT23-3]  42.42,91.69 270 top
Q74  MOSFET-NCHANNELSMD  [SOT23-3]  42.42,95.5 270 top
Q75  MOSFET-NCHANNELSMD  [SOT23-3]  84.84,91.69 270 top
Q76  MOSFET-NCHANNELSMD  [SOT23-3]  84.84,95.5 270 top
Q77  MOSFET-NCHANNELSMD  [SOT23-3]  127.25,91.69 270 top
Q78  MOSFET-NCHANNELSMD  [SOT23-3]  127.25,95.5 270 top
Q79  MOSFET-NCHANNELSMD  [SOT23-3]  42.42,108.2 270 top
Q80  MOSFET-NCHANNELSMD  [SOT23-3]  42.42,112.01 270 top
Q81  MOSFET-NCHANNELSMD  [SOT23-3]  84.84,108.2 270 top
Q82  MOSFET-NCHANNELSMD  [SOT23-3]  84.84,112.01 270 top
Q83  MOSFET-NCHANNELSMD  [SOT23-3]  127.25,108.2 270 top
Q84  MOSFET-NCHANNELSMD  [SOT23-3]  127.25,112.01 270 top
Q85  MOSFET-NCHANNELSMD  [SOT23-3]  42.42,124.71 270 top
Q86  MOSFET-NCHANNELSMD  [SOT23-3]  42.42,128.52 270 top
Q87  MOSFET-NCHANNELSMD  [SOT23-3]  84.84,124.71 270 top
Q88  MOSFET-NCHANNELSMD  [SOT23-3]  84.84,128.52 270 top
Q89  MOSFET-NCHANNELSMD  [SOT23-3]  127.25,124.71 270 top
Q90  MOSFET-NCHANNELSMD  [SOT23-3]  127.25,128.52 270 top
Q91  MOSFET-NCHANNELSMD  [SOT23-3]  42.42,141.22 270 top
Q92  MOSFET-NCHANNELSMD  [SOT23-3]  42.42,145.03 270 top
Q93  MOSFET-NCHANNELSMD  [SOT23-3]  84.84,141.22 270 top
Q94  MOSFET-NCHANNELSMD  [SOT23-3]  84.84,145.03 270 top
Q95  MOSFET-NCHANNELSMD  [SOT23-3]  127.25,141.22 270 top
Q96  MOSFET-NCHANNELSMD  [SOT23-3]  127.25,145.03 270 top
R1  330  [0603-RES]  44.32,8.13 180 top
R2  10K  [0603-RES]  44.32,21.78 0 top
R3  10K  [0603-RES]  39.88,15.75 270 top
R4  10K  [0603-RES]  44.96,15.75 270 top
R5  10K  [0603-RES]  40.51,21.78 0 top
R6  330  [0603-RES]  42.42,18.29 180 top
R7  10K  [0603-RES]  39.88,11.94 270 top
R8  10K  [0603-RES]  44.96,11.94 90 top
R9  10K  [0603-RES]  36.7,20.83 180 top
R10  330  [0603-RES]  86.74,8.13 180 top
R11  10K  [0603-RES]  82.3,11.94 270 top
R12  10K  [0603-RES]  87.38,11.94 90 top
R13  10K  [0603-RES]  86.74,21.78 0 top
R14  10K  [0603-RES]  82.3,15.75 270 top
R15  10K  [0603-RES]  87.38,15.75 270 top
R16  10K  [0603-RES]  82.93,21.78 0 top
R17  330  [0603-RES]  84.84,18.29 180 top
R18  10K  [0603-RES]  79.12,20.83 180 top
R19  330  [0603-RES]  129.16,8.13 180 top
R20  10K  [0603-RES]  124.71,11.94 270 top
R21  10K  [0603-RES]  129.79,11.94 90 top
R22  10K  [0603-RES]  129.16,21.78 0 top
R23  10K  [0603-RES]  124.71,15.75 270 top
R24  10K  [0603-RES]  129.79,15.75 270 top
R25  10K  [0603-RES]  125.35,21.78 0 top
R26  330  [0603-RES]  127.25,18.29 180 top
R27  10K  [0603-RES]  121.54,20.83 180 top
R28  330  [0603-RES]  44.32,24.64 180 top
R29  10K  [0603-RES]  39.88,28.45 270 top
R30  10K  [0603-RES]  44.96,28.45 90 top
R31  10K  [0603-RES]  44.32,38.29 0 top
R32  10K  [0603-RES]  39.88,32.26 270 top
R33  10K  [0603-RES]  44.96,32.26 270 top
R34  10K  [0603-RES]  40.51,38.29 0 top
R35  330  [0603-RES]  42.42,34.8 180 top
R36  10K  [0603-RES]  36.7,37.34 180 top
R37  330  [0603-RES]  86.74,24.64 180 top
R38  10K  [0603-RES]  82.3,28.45 270 top
R39  10K  [0603-RES]  87.38,28.45 90 top
R40  10K  [0603-RES]  86.74,38.29 0 top
R41  10K  [0603-RES]  82.3,32.26 270 top
R42  10K  [0603-RES]  87.38,32.26 270 top
R43  10K  [0603-RES]  82.93,38.29 0 top
R44  330  [0603-RES]  84.84,34.8 180 top
R45  10K  [0603-RES]  79.12,37.34 180 top
R46  330  [0603-RES]  129.16,24.64 180 top
R47  10K  [0603-RES]  124.71,28.45 270 top
R48  10K  [0603-RES]  129.79,28.45 90 top
R49  10K  [0603-RES]  129.16,38.29 0 top
R50  10K  [0603-RES]  124.71,32.26 270 top
R51  10K  [0603-RES]  129.79,32.26 270 top
R52  10K  [0603-RES]  125.35,38.29 0 top
R53  330  [0603-RES]  127.25,34.8 180 top
R54  10K  [0603-RES]  121.54,37.34 180 top
R55  330  [0603-RES]  44.32,41.15 180 top
R56  10K  [0603-RES]  39.88,44.96 270 top
R57  10K  [0603-RES]  44.96,44.96 90 top
R58  10K  [0603-RES]  44.32,54.8 0 top
R59  10K  [0603-RES]  39.88,48.77 270 top
R60  10K  [0603-RES]  44.96,48.77 270 top
R61  10K  [0603-RES]  40.51,54.8 0 top
R62  330  [0603-RES]  42.42,51.31 180 top
R63  10K  [0603-RES]  36.7,53.85 180 top
R64  330  [0603-RES]  86.74,41.15 180 top
R65  10K  [0603-RES]  82.3,44.96 270 top
R66  10K  [0603-RES]  87.38,44.96 90 top
R67  10K  [0603-RES]  86.74,54.8 0 top
R68  10K  [0603-RES]  82.3,48.77 270 top
R69  10K  [0603-RES]  87.38,48.77 270 top
R70  10K  [0603-RES]  82.93,54.8 0 top
R71  330  [0603-RES]  84.84,51.31 180 top
R72  10K  [0603-RES]  79.12,53.85 180 top
R73  330  [0603-RES]  129.16,41.15 180 top
R74  10K  [0603-RES]  124.71,44.96 270 top
R75  10K  [0603-RES]  129.79,44.96 90 top
R76  10K  [0603-RES]  129.16,54.8 0 top
R77  10K  [0603-RES]  124.71,48.77 270 top
R78  10K  [0603-RES]  129.79,48.77 270 top
R79  10K  [0603-RES]  125.35,54.8 0 top
R80  330  [0603-RES]  127.25,51.31 180 top
R81  10K  [0603-RES]  121.54,53.85 180 top
R82  330  [0603-RES]  44.32,57.66 180 top
R83  10K  [0603-RES]  39.88,61.47 270 top
R84  10K  [0603-RES]  44.96,61.47 90 top
R85  10K  [0603-RES]  44.32,71.31 0 top
R86  10K  [0603-RES]  39.88,65.28 270 top
R87  10K  [0603-RES]  44.96,65.28 270 top
R88  10K  [0603-RES]  40.51,71.31 0 top
R89  330  [0603-RES]  42.42,67.82 180 top
R90  10K  [0603-RES]  36.7,70.36 180 top
R91  330  [0603-RES]  86.74,57.66 180 top
R92  10K  [0603-RES]  82.3,61.47 270 top
R93  10K  [0603-RES]  87.38,61.47 90 top
R94  10K  [0603-RES]  86.74,71.31 0 top
R95  10K  [0603-RES]  82.3,65.28 270 top
R96  10K  [0603-RES]  87.38,65.28 270 top
R97  10K  [0603-RES]  82.93,71.31 0 top
R98  330  [0603-RES]  84.84,67.82 180 top
R99  10K  [0603-RES]  79.12,70.36 180 top
R100  330  [0603-RES]  129.16,57.66 180 top
R101  10K  [0603-RES]  124.71,61.47 270 top
R102  10K  [0603-RES]  129.79,61.47 90 top
R103  10K  [0603-RES]  129.16,71.31 0 top
R104  10K  [0603-RES]  124.71,65.28 270 top
R105  10K  [0603-RES]  129.79,65.28 270 top
R106  10K  [0603-RES]  125.35,71.31 0 top
R107  330  [0603-RES]  127.25,67.82 180 top
R108  10K  [0603-RES]  121.54,70.36 180 top
R109  330  [0603-RES]  185.29,8.13 180 top
R110  10K  [0603-RES]  180.85,11.94 270 top
R111  10K  [0603-RES]  185.93,11.94 90 top
R112  10K  [0603-RES]  185.29,21.78 0 top
R113  10K  [0603-RES]  180.85,15.75 270 top
R114  10K  [0603-RES]  185.93,15.75 270 top
R115  10K  [0603-RES]  181.48,21.78 0 top
R116  330  [0603-RES]  183.39,18.29 180 top
R117  10K  [0603-RES]  177.67,20.83 180 top
R118  330  [0603-RES]  227.71,8.13 180 top
R119  10K  [0603-RES]  223.27,11.94 270 top
R120  10K  [0603-RES]  228.35,11.94 90 top
R121  10K  [0603-RES]  227.71,21.78 0 top
R122  10K  [0603-RES]  223.27,15.75 270 top
R123  10K  [0603-RES]  228.35,15.75 270 top
R124  10K  [0603-RES]  223.9,21.78 0 top
R125  330  [0603-RES]  225.81,18.29 180 top
R126  10K  [0603-RES]  220.09,20.83 180 top
R127  330  [0603-RES]  270.13,8.13 180 top
R128  10K  [0603-RES]  265.68,11.94 270 top
R129  10K  [0603-RES]  270.76,11.94 90 top
R130  10K  [0603-RES]  270.13,21.78 0 top
R131  10K  [0603-RES]  265.68,15.75 270 top
R132  10K  [0603-RES]  270.76,15.75 270 top
R133  10K  [0603-RES]  266.32,21.78 0 top
R134  330  [0603-RES]  268.22,18.29 180 top
R135  10K  [0603-RES]  262.51,20.83 180 top
R136  330  [0603-RES]  185.29,24.64 180 top
R137  10K  [0603-RES]  180.85,28.45 270 top
R138  10K  [0603-RES]  185.93,28.45 90 top
R139  10K  [0603-RES]  185.29,38.29 0 top
R140  10K  [0603-RES]  180.85,32.26 270 top
R141  10K  [0603-RES]  185.93,32.26 270 top
R142  10K  [0603-RES]  181.48,38.29 0 top
R143  330  [0603-RES]  183.39,34.8 180 top
R144  10K  [0603-RES]  177.67,37.34 180 top
R145  330  [0603-RES]  227.71,24.64 180 top
R146  10K  [0603-RES]  223.27,28.45 270 top
R147  10K  [0603-RES]  228.35,28.45 90 top
R148  10K  [0603-RES]  227.71,38.29 0 top
R149  10K  [0603-RES]  223.27,32.26 270 top
R150  10K  [0603-RES]  228.35,32.26 270 top
R151  10K  [0603-RES]  223.9,38.29 0 top
R152  330  [0603-RES]  225.81,34.8 180 top
R153  10K  [0603-RES]  220.09,37.34 180 top
R154  330  [0603-RES]  270.13,24.64 180 top
R155  10K  [0603-RES]  265.68,28.45 270 top
R156  10K  [0603-RES]  270.76,28.45 90 top
R157  10K  [0603-RES]  270.13,38.29 0 top
R158  10K  [0603-RES]  265.68,32.26 270 top
R159  10K  [0603-RES]  270.76,32.26 270 top
R160  10K  [0603-RES]  266.32,38.29 0 top
R161  330  [0603-RES]  268.22,34.8 180 top
R162  10K  [0603-RES]  262.51,37.34 180 top
R163  330  [0603-RES]  185.29,41.15 180 top
R164  10K  [0603-RES]  180.85,44.96 270 top
R165  10K  [0603-RES]  185.93,44.96 90 top
R166  10K  [0603-RES]  185.29,54.8 0 top
R167  10K  [0603-RES]  180.85,48.77 270 top
R168  10K  [0603-RES]  185.93,48.77 270 top
R169  10K  [0603-RES]  181.48,54.8 0 top
R170  330  [0603-RES]  183.39,51.31 180 top
R171  10K  [0603-RES]  177.67,53.85 180 top
R172  330  [0603-RES]  227.71,41.15 180 top
R173  10K  [0603-RES]  223.27,44.96 270 top
R174  10K  [0603-RES]  228.35,44.96 90 top
R175  10K  [0603-RES]  227.71,54.8 0 top
R176  10K  [0603-RES]  223.27,48.77 270 top
R177  10K  [0603-RES]  228.35,48.77 270 top
R178  10K  [0603-RES]  223.9,54.8 0 top
R179  330  [0603-RES]  225.81,51.31 180 top
R180  10K  [0603-RES]  220.09,53.85 180 top
R181  330  [0603-RES]  270.13,41.15 180 top
R182  10K  [0603-RES]  265.68,44.96 270 top
R183  10K  [0603-RES]  270.76,44.96 90 top
R184  10K  [0603-RES]  270.13,54.8 0 top
R185  10K  [0603-RES]  265.68,48.77 270 top
R186  10K  [0603-RES]  270.76,48.77 270 top
R187  10K  [0603-RES]  266.32,54.8 0 top
R188  330  [0603-RES]  268.22,51.31 180 top
R189  10K  [0603-RES]  262.51,53.85 180 top
R190  330  [0603-RES]  185.29,57.66 180 top
R191  10K  [0603-RES]  180.85,61.47 270 top
R192  10K  [0603-RES]  185.93,61.47 90 top
R193  10K  [0603-RES]  185.29,71.31 0 top
R194  10K  [0603-RES]  180.85,65.28 270 top
R195  10K  [0603-RES]  185.93,65.28 270 top
R196  10K  [0603-RES]  181.48,71.31 0 top
R197  330  [0603-RES]  183.39,67.82 180 top
R198  10K  [0603-RES]  177.67,70.36 180 top
R199  330  [0603-RES]  227.71,57.66 180 top
R200  10K  [0603-RES]  223.27,61.47 270 top
R201  10K  [0603-RES]  228.35,61.47 90 top
R202  10K  [0603-RES]  227.71,71.31 0 top
R203  10K  [0603-RES]  223.27,65.28 270 top
R204  10K  [0603-RES]  228.35,65.28 270 top
R205  10K  [0603-RES]  223.9,71.31 0 top
R206  330  [0603-RES]  225.81,67.82 180 top
R207  10K  [0603-RES]  220.09,70.36 180 top
R208  330  [0603-RES]  270.13,57.66 180 top
R209  10K  [0603-RES]  265.68,61.47 270 top
R210  10K  [0603-RES]  270.76,61.47 90 top
R211  10K  [0603-RES]  270.13,71.31 0 top
R212  10K  [0603-RES]  265.68,65.28 270 top
R213  10K  [0603-RES]  270.76,65.28 270 top
R214  10K  [0603-RES]  266.32,71.31 0 top
R215  330  [0603-RES]  268.22,67.82 180 top
R216  10K  [0603-RES]  262.51,70.36 180 top
R217  330  [0603-RES]  185.29,87.88 180 top
R218  10K  [0603-RES]  180.85,91.69 270 top
R219  10K  [0603-RES]  185.93,91.69 90 top
R220  10K  [0603-RES]  185.29,101.54 0 top
R221  10K  [0603-RES]  180.85,95.5 270 top
R222  10K  [0603-RES]  185.93,95.5 270 top
R223  10K  [0603-RES]  181.48,101.54 0 top
R224  330  [0603-RES]  183.39,98.04 180 top
R225  10K  [0603-RES]  177.67,100.58 180 top
R226  330  [0603-RES]  227.71,87.88 180 top
R227  10K  [0603-RES]  223.27,91.69 270 top
R228  10K  [0603-RES]  228.35,91.69 90 top
R229  10K  [0603-RES]  227.71,101.54 0 top
R230  10K  [0603-RES]  223.27,95.5 270 top
R231  10K  [0603-RES]  228.35,95.5 270 top
R232  10K  [0603-RES]  223.9,101.54 0 top
R233  330  [0603-RES]  225.81,98.04 180 top
R234  10K  [0603-RES]  220.09,100.58 180 top
R235  330  [0603-RES]  270.13,87.88 180 top
R236  10K  [0603-RES]  265.68,91.69 270 top
R237  10K  [0603-RES]  270.76,91.69 90 top
R238  10K  [0603-RES]  270.13,101.54 0 top
R239  10K  [0603-RES]  265.68,95.5 270 top
R240  10K  [0603-RES]  270.76,95.5 270 top
R241  10K  [0603-RES]  266.32,101.54 0 top
R242  330  [0603-RES]  268.22,98.04 180 top
R243  10K  [0603-RES]  262.51,100.58 180 top
R244  330  [0603-RES]  185.29,104.39 180 top
R245  10K  [0603-RES]  180.85,108.2 270 top
R246  10K  [0603-RES]  185.93,108.2 90 top
R247  10K  [0603-RES]  185.29,118.05 0 top
R248  10K  [0603-RES]  180.85,112.01 270 top
R249  10K  [0603-RES]  185.93,112.01 270 top
R250  10K  [0603-RES]  181.48,118.05 0 top
R251  330  [0603-RES]  183.39,114.55 180 top
R252  10K  [0603-RES]  177.67,117.09 180 top
R253  330  [0603-RES]  227.71,104.39 180 top
R254  10K  [0603-RES]  223.27,108.2 270 top
R255  10K  [0603-RES]  228.35,108.2 90 top
R256  10K  [0603-RES]  227.71,118.05 0 top
R257  10K  [0603-RES]  223.27,112.01 270 top
R258  10K  [0603-RES]  228.35,112.01 270 top
R259  10K  [0603-RES]  223.9,118.05 0 top
R260  330  [0603-RES]  225.81,114.55 180 top
R261  10K  [0603-RES]  220.09,117.09 180 top
R262  330  [0603-RES]  270.13,104.39 180 top
R263  10K  [0603-RES]  265.68,108.2 270 top
R264  10K  [0603-RES]  270.76,108.2 90 top
R265  10K  [0603-RES]  270.13,118.05 0 top
R266  10K  [0603-RES]  265.68,112.01 270 top
R267  10K  [0603-RES]  270.76,112.01 270 top
R268  10K  [0603-RES]  266.32,118.05 0 top
R269  330  [0603-RES]  268.22,114.55 180 top
R270  10K  [0603-RES]  262.51,117.09 180 top
R271  330  [0603-RES]  185.29,120.9 180 top
R272  10K  [0603-RES]  180.85,124.71 270 top
R273  10K  [0603-RES]  185.93,124.71 90 top
R274  10K  [0603-RES]  185.29,134.56 0 top
R275  10K  [0603-RES]  180.85,128.52 270 top
R276  10K  [0603-RES]  185.93,128.52 270 top
R277  10K  [0603-RES]  181.48,134.56 0 top
R278  330  [0603-RES]  183.39,131.06 180 top
R279  10K  [0603-RES]  177.67,133.6 180 top
R280  330  [0603-RES]  227.71,120.9 180 top
R281  10K  [0603-RES]  223.27,124.71 270 top
R282  10K  [0603-RES]  228.35,124.71 90 top
R283  10K  [0603-RES]  227.71,134.56 0 top
R284  10K  [0603-RES]  223.27,128.52 270 top
R285  10K  [0603-RES]  228.35,128.52 270 top
R286  10K  [0603-RES]  223.9,134.56 0 top
R287  330  [0603-RES]  225.81,131.06 180 top
R288  10K  [0603-RES]  220.09,133.6 180 top
R289  330  [0603-RES]  270.13,120.9 180 top
R290  10K  [0603-RES]  265.68,124.71 270 top
R291  10K  [0603-RES]  270.76,124.71 90 top
R292  10K  [0603-RES]  270.13,134.56 0 top
R293  10K  [0603-RES]  265.68,128.52 270 top
R294  10K  [0603-RES]  270.76,128.52 270 top
R295  10K  [0603-RES]  266.32,134.56 0 top
R296  330  [0603-RES]  268.22,131.06 180 top
R297  10K  [0603-RES]  262.51,133.6 180 top
R298  330  [0603-RES]  185.29,137.41 180 top
R299  10K  [0603-RES]  180.85,141.22 270 top
R300  10K  [0603-RES]  185.93,141.22 90 top
R301  10K  [0603-RES]  185.29,151.07 0 top
R302  10K  [0603-RES]  180.85,145.03 270 top
R303  10K  [0603-RES]  185.93,145.03 270 top
R304  10K  [0603-RES]  181.48,151.07 0 top
R305  330  [0603-RES]  183.39,147.57 180 top
R306  10K  [0603-RES]  177.67,150.11 180 top
R307  330  [0603-RES]  227.71,137.41 180 top
R308  10K  [0603-RES]  223.27,141.22 270 top
R309  10K  [0603-RES]  228.35,141.22 90 top
R310  10K  [0603-RES]  227.71,151.07 0 top
R311  10K  [0603-RES]  223.27,145.03 270 top
R312  10K  [0603-RES]  228.35,145.03 270 top
R313  10K  [0603-RES]  223.9,151.07 0 top
R314  330  [0603-RES]  225.81,147.57 180 top
R315  10K  [0603-RES]  220.09,150.11 180 top
R316  330  [0603-RES]  270.13,137.41 180 top
R317  10K  [0603-RES]  265.68,141.22 270 top
R318  10K  [0603-RES]  270.76,141.22 90 top
R319  10K  [0603-RES]  270.13,151.07 0 top
R320  10K  [0603-RES]  265.68,145.03 270 top
R321  10K  [0603-RES]  270.76,145.03 270 top
R322  10K  [0603-RES]  266.32,151.07 0 top
R323  330  [0603-RES]  268.22,147.57 180 top
R324  10K  [0603-RES]  262.51,150.11 180 top
R325  330  [0603-RES]  44.32,87.88 180 top
R326  10K  [0603-RES]  39.88,91.69 270 top
R327  10K  [0603-RES]  44.96,91.69 90 top
R328  10K  [0603-RES]  44.32,101.54 0 top
R329  10K  [0603-RES]  39.88,95.5 270 top
R330  10K  [0603-RES]  44.96,95.5 270 top
R331  10K  [0603-RES]  40.51,101.54 0 top
R332  330  [0603-RES]  42.42,98.04 180 top
R333  10K  [0603-RES]  36.7,100.58 180 top
R334  330  [0603-RES]  86.74,87.88 180 top
R335  10K  [0603-RES]  82.3,91.69 270 top
R336  10K  [0603-RES]  87.38,91.69 90 top
R337  10K  [0603-RES]  86.74,101.54 0 top
R338  10K  [0603-RES]  82.3,95.5 270 top
R339  10K  [0603-RES]  87.38,95.5 270 top
R340  10K  [0603-RES]  82.93,101.54 0 top
R341  330  [0603-RES]  84.84,98.04 180 top
R342  10K  [0603-RES]  79.12,100.58 180 top
R343  330  [0603-RES]  129.16,87.88 180 top
R344  10K  [0603-RES]  124.71,91.69 270 top
R345  10K  [0603-RES]  129.79,91.69 90 top
R346  10K  [0603-RES]  129.16,101.54 0 top
R347  10K  [0603-RES]  124.71,95.5 270 top
R348  10K  [0603-RES]  129.79,95.5 270 top
R349  10K  [0603-RES]  125.35,101.54 0 top
R350  330  [0603-RES]  127.25,98.04 180 top
R351  10K  [0603-RES]  121.54,100.58 180 top
R352  330  [0603-RES]  44.32,104.39 180 top
R353  10K  [0603-RES]  39.88,108.2 270 top
R354  10K  [0603-RES]  44.96,108.2 90 top
R355  10K  [0603-RES]  44.32,118.05 0 top
R356  10K  [0603-RES]  39.88,112.01 270 top
R357  10K  [0603-RES]  44.96,112.01 270 top
R358  10K  [0603-RES]  40.51,118.05 0 top
R359  330  [0603-RES]  42.42,114.55 180 top
R360  10K  [0603-RES]  36.7,117.09 180 top
R361  330  [0603-RES]  86.74,104.39 180 top
R362  10K  [0603-RES]  82.3,108.2 270 top
R363  10K  [0603-RES]  87.38,108.2 90 top
R364  10K  [0603-RES]  86.74,118.05 0 top
R365  10K  [0603-RES]  82.3,112.01 270 top
R366  10K  [0603-RES]  87.38,112.01 270 top
R367  10K  [0603-RES]  82.93,118.05 0 top
R368  330  [0603-RES]  84.84,114.55 180 top
R369  10K  [0603-RES]  79.12,117.09 180 top
R370  330  [0603-RES]  129.16,104.39 180 top
R371  10K  [0603-RES]  124.71,108.2 270 top
R372  10K  [0603-RES]  129.79,108.2 90 top
R373  10K  [0603-RES]  129.16,118.05 0 top
R374  10K  [0603-RES]  124.71,112.01 270 top
R375  10K  [0603-RES]  129.79,112.01 270 top
R376  10K  [0603-RES]  125.35,118.05 0 top
R377  330  [0603-RES]  127.25,114.55 180 top
R378  10K  [0603-RES]  121.54,117.09 180 top
R379  330  [0603-RES]  44.32,120.9 180 top
R380  10K  [0603-RES]  39.88,124.71 270 top
R381  10K  [0603-RES]  44.96,124.71 90 top
R382  10K  [0603-RES]  44.32,134.56 0 top
R383  10K  [0603-RES]  39.88,128.52 270 top
R384  10K  [0603-RES]  44.96,128.52 270 top
R385  10K  [0603-RES]  40.51,134.56 0 top
R386  330  [0603-RES]  42.42,131.06 180 top
R387  10K  [0603-RES]  36.7,133.6 180 top
R388  330  [0603-RES]  86.74,120.9 180 top
R389  10K  [0603-RES]  82.3,124.71 270 top
R390  10K  [0603-RES]  87.38,124.71 90 top
R391  10K  [0603-RES]  86.74,134.56 0 top
R392  10K  [0603-RES]  82.3,128.52 270 top
R393  10K  [0603-RES]  87.38,128.52 270 top
R394  10K  [0603-RES]  82.93,134.56 0 top
R395  330  [0603-RES]  84.84,131.06 180 top
R396  10K  [0603-RES]  79.12,133.6 180 top
R397  330  [0603-RES]  129.16,120.9 180 top
R398  10K  [0603-RES]  124.71,124.71 270 top
R399  10K  [0603-RES]  129.79,124.71 90 top
R400  10K  [0603-RES]  129.16,134.56 0 top
R401  10K  [0603-RES]  124.71,128.52 270 top
R402  10K  [0603-RES]  129.79,128.52 270 top
R403  10K  [0603-RES]  125.35,134.56 0 top
R404  330  [0603-RES]  127.25,131.06 180 top
R405  10K  [0603-RES]  121.54,133.6 180 top
R406  330  [0603-RES]  44.32,137.41 180 top
R407  10K  [0603-RES]  39.88,141.22 270 top
R408  10K  [0603-RES]  44.96,141.22 90 top
R409  10K  [0603-RES]  44.32,151.07 0 top
R410  10K  [0603-RES]  39.88,145.03 270 top
R411  10K  [0603-RES]  44.96,145.03 270 top
R412  10K  [0603-RES]  40.51,151.07 0 top
R413  330  [0603-RES]  42.42,147.57 180 top
R414  10K  [0603-RES]  36.7,150.11 180 top
R415  330  [0603-RES]  86.74,137.41 180 top
R416  10K  [0603-RES]  82.3,141.22 270 top
R417  10K  [0603-RES]  87.38,141.22 90 top
R418  10K  [0603-RES]  86.74,151.07 0 top
R419  10K  [0603-RES]  82.3,145.03 270 top
R420  10K  [0603-RES]  87.38,145.03 270 top
R421  10K  [0603-RES]  82.93,151.07 0 top
R422  330  [0603-RES]  84.84,147.57 180 top
R423  10K  [0603-RES]  79.12,150.11 180 top
R424  330  [0603-RES]  129.16,137.41 180 top
R425  10K  [0603-RES]  124.71,141.22 270 top
R426  10K  [0603-RES]  129.79,141.22 90 top
R427  10K  [0603-RES]  129.16,151.07 0 top
R428  10K  [0603-RES]  124.71,145.03 270 top
R429  10K  [0603-RES]  129.79,145.03 270 top
R430  10K  [0603-RES]  125.35,151.07 0 top
R431  330  [0603-RES]  127.25,147.57 180 top
R432  10K  [0603-RES]  121.54,150.11 180 top
SJ1  SOLDERJUMPERNO  [SJ_2S-NO]  25.91,18.29 90 bottom
SJ2  SOLDERJUMPERNO  [SJ_2S-NO]  68.33,18.29 90 bottom
SJ3  SOLDERJUMPERNO  [SJ_2S-NO]  110.74,18.29 90 bottom
SJ4  SOLDERJUMPERNO  [SJ_2S-NO]  25.91,34.8 90 bottom
SJ5  SOLDERJUMPERNO  [SJ_2S-NO]  68.33,34.8 90 bottom
SJ6  SOLDERJUMPERNO  [SJ_2S-NO]  110.74,34.8 90 bottom
SJ7  SOLDERJUMPERNO  [SJ_2S-NO]  25.91,51.31 90 bottom
SJ8  SOLDERJUMPERNO  [SJ_2S-NO]  68.33,51.31 90 bottom
SJ9  SOLDERJUMPERNO  [SJ_2S-NO]  110.74,51.31 90 bottom
SJ10  SOLDERJUMPERNO  [SJ_2S-NO]  25.91,67.82 90 bottom
SJ11  SOLDERJUMPERNO  [SJ_2S-NO]  68.33,67.82 90 bottom
SJ12  SOLDERJUMPERNO  [SJ_2S-NO]  110.74,67.82 90 bottom
SJ13  SOLDERJUMPERNO  [SJ_2S-NO]  166.88,18.29 90 bottom
SJ14  SOLDERJUMPERNO  [SJ_2S-NO]  209.3,18.29 90 bottom
SJ15  SOLDERJUMPERNO  [SJ_2S-NO]  251.71,18.29 90 bottom
SJ16  SOLDERJUMPERNO  [SJ_2S-NO]  166.88,34.8 90 bottom
SJ17  SOLDERJUMPERNO  [SJ_2S-NO]  209.3,34.8 90 bottom
SJ18  SOLDERJUMPERNO  [SJ_2S-NO]  251.71,34.8 90 bottom
SJ19  SOLDERJUMPERNO  [SJ_2S-NO]  166.88,51.31 90 bottom
SJ20  SOLDERJUMPERNO  [SJ_2S-NO]  209.3,51.31 90 bottom
SJ21  SOLDERJUMPERNO  [SJ_2S-NO]  251.71,51.31 90 bottom
SJ22  SOLDERJUMPERNO  [SJ_2S-NO]  166.88,67.82 90 bottom
SJ23  SOLDERJUMPERNO  [SJ_2S-NO]  209.3,67.82 90 bottom
SJ24  SOLDERJUMPERNO  [SJ_2S-NO]  251.71,67.82 90 bottom
SJ25  SOLDERJUMPERNO  [SJ_2S-NO]  166.88,98.04 90 bottom
SJ26  SOLDERJUMPERNO  [SJ_2S-NO]  209.3,98.04 90 bottom
SJ27  SOLDERJUMPERNO  [SJ_2S-NO]  251.71,98.04 90 bottom
SJ28  SOLDERJUMPERNO  [SJ_2S-NO]  166.88,114.55 90 bottom
SJ29  SOLDERJUMPERNO  [SJ_2S-NO]  209.3,114.55 90 bottom
SJ30  SOLDERJUMPERNO  [SJ_2S-NO]  251.71,114.55 90 bottom
SJ31  SOLDERJUMPERNO  [SJ_2S-NO]  166.88,131.06 90 bottom
SJ32  SOLDERJUMPERNO  [SJ_2S-NO]  209.3,131.06 90 bottom
SJ33  SOLDERJUMPERNO  [SJ_2S-NO]  251.71,131.06 90 bottom
SJ34  SOLDERJUMPERNO  [SJ_2S-NO]  166.88,147.57 90 bottom
SJ35  SOLDERJUMPERNO  [SJ_2S-NO]  209.3,147.57 90 bottom
SJ36  SOLDERJUMPERNO  [SJ_2S-NO]  251.71,147.57 90 bottom
SJ37  SOLDERJUMPERNO  [SJ_2S-NO]  25.91,98.04 90 bottom
SJ38  SOLDERJUMPERNO  [SJ_2S-NO]  68.33,98.04 90 bottom
SJ39  SOLDERJUMPERNO  [SJ_2S-NO]  110.74,98.04 90 bottom
SJ40  SOLDERJUMPERNO  [SJ_2S-NO]  25.91,114.55 90 bottom
SJ41  SOLDERJUMPERNO  [SJ_2S-NO]  68.33,114.55 90 bottom
SJ42  SOLDERJUMPERNO  [SJ_2S-NO]  110.74,114.55 90 bottom
SJ43  SOLDERJUMPERNO  [SJ_2S-NO]  25.91,131.06 90 bottom
SJ44  SOLDERJUMPERNO  [SJ_2S-NO]  68.33,131.06 90 bottom
SJ45  SOLDERJUMPERNO  [SJ_2S-NO]  110.74,131.06 90 bottom
SJ46  SOLDERJUMPERNO  [SJ_2S-NO]  25.91,147.57 90 bottom
SJ47  SOLDERJUMPERNO  [SJ_2S-NO]  68.33,147.57 90 bottom
SJ48  SOLDERJUMPERNO  [SJ_2S-NO]  110.74,147.57 90 bottom
TP1  [PAD.03X.05]  28.45,10.67 0 bottom
TP2  [PAD.03X.05]  70.87,10.67 0 bottom
TP3  [PAD.03X.05]  113.28,10.67 0 bottom
TP4  [PAD.03X.05]  28.45,27.18 0 bottom
TP5  [PAD.03X.05]  70.87,27.18 0 bottom
TP6  [PAD.03X.05]  113.28,27.18 0 bottom
TP7  [PAD.03X.05]  28.45,43.69 0 bottom
TP8  [PAD.03X.05]  70.87,43.69 0 bottom
TP9  [PAD.03X.05]  113.28,43.69 0 bottom
TP10  [PAD.03X.05]  28.45,60.2 0 bottom
TP11  [PAD.03X.05]  70.87,60.2 0 bottom
TP12  [PAD.03X.05]  113.28,60.2 0 bottom
TP13  [PAD.03X.05]  169.42,10.67 0 bottom
TP14  [PAD.03X.05]  211.84,10.67 0 bottom
TP15  [PAD.03X.05]  254.25,10.67 0 bottom
TP16  [PAD.03X.05]  169.42,27.18 0 bottom
TP17  [PAD.03X.05]  211.84,27.18 0 bottom
TP18  [PAD.03X.05]  254.25,27.18 0 bottom
TP19  [PAD.03X.05]  169.42,43.69 0 bottom
TP20  [PAD.03X.05]  211.84,43.69 0 bottom
TP21  [PAD.03X.05]  254.25,43.69 0 bottom
TP22  [PAD.03X.05]  169.42,60.2 0 bottom
TP23  [PAD.03X.05]  211.84,60.2 0 bottom
TP24  [PAD.03X.05]  254.25,60.2 0 bottom
TP25  [PAD.03X.05]  169.42,90.42 0 bottom
TP26  [PAD.03X.05]  211.84,90.42 0 bottom
TP27  [PAD.03X.05]  254.25,90.42 0 bottom
TP28  [PAD.03X.05]  169.42,106.93 0 bottom
TP29  [PAD.03X.05]  211.84,106.93 0 bottom